# EAGLE board sdo_to_quiic (EAGLE 9.5.2)
REV: A
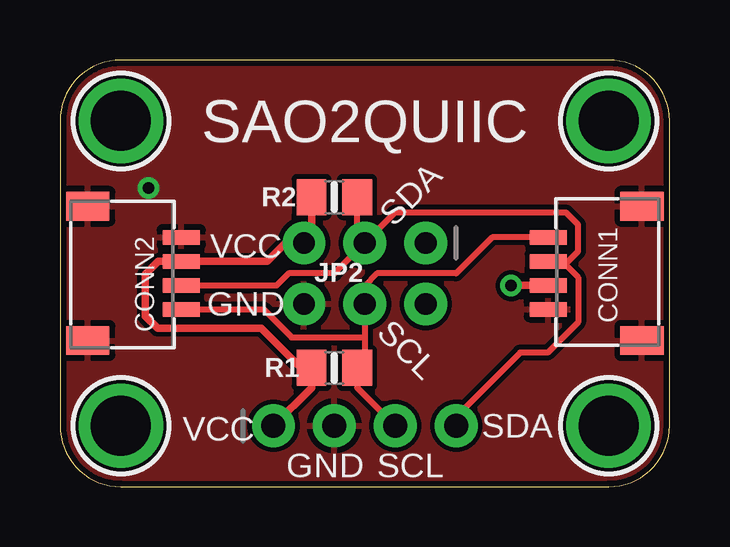
[diagram p0: board, top side]
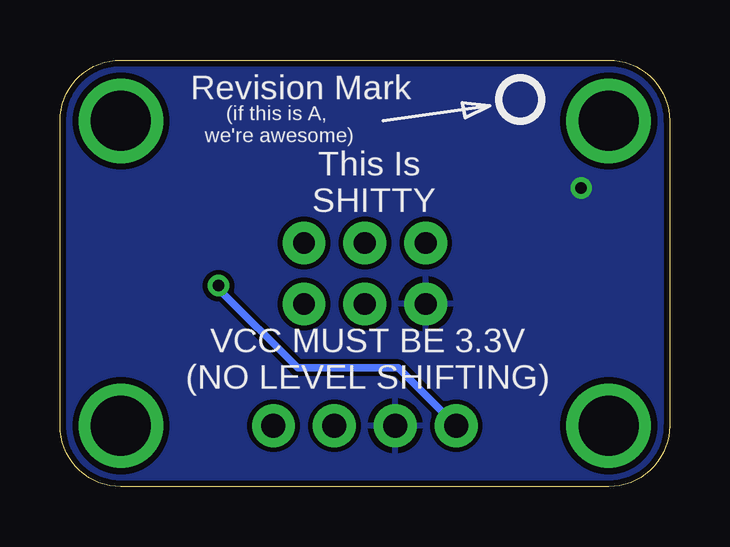
[diagram p1: board, bottom side, seen from below]

Size 25.4 x 17.78 mm. Coordinates in mm from the lower left corner, seen from the top.
Outline: 0,15.24 0,2.54 arc90 2.54,0 22.86,0 arc90 25.4,2.54 25.4,15.24 arc90 22.86,17.78 2.54,17.78 arc90 0,15.24
Copper layers (1*16): Top 0.035mm / dielectric 1.5mm / Bottom 0.035mm
Design rules "adafruit *": minimum track width 8mil, minimum drill 15.5mil, track to track 8mil, track to pad 8mil, pad to pad 8mil, via to via 8mil, smd to smd 8mil, copper to edge 10mil, drill to drill 8mil, minimum pad ring 10mil, minimum via ring 8mil, stop-mask expansion 2mil, vias tented up to drill 20mil, thermal gap 10mil
Net classes: 1 highpower: width 0.305 mm, drill 0.483 mm; 2 lowpower: width 0.254 mm, drill 0.483 mm

## Footprints (pad centres in the part's own frame; a part is rotated, then mirrored left to right if it is on the bottom)
JST_SH4 = smd 0.6 x 1.55: 1 -1.5,2.514; 2 -0.5,2.514; 3 0.5,2.514; 4 1.5,2.514 | smd 1.2 x 1.8: MT1 -2.8,-1.386; MT2 2.8,-1.386
2X03_ROUND_70MIL = drill 0.9 pad 1.778: 1 -2.54,-1.27; 2 -2.54,1.27; 3 0,-1.27; 4 0,1.27; 5 2.54,-1.27; 6 2.54,1.27
1X04_ROUND = drill 1 pad 1.778: 1 -3.81,0; 2 -1.27,0; 3 1.27,0; 4 3.81,0
0805-NO = smd 1.24 x 1.5: 1 -0.95,0; 2 0.95,0
MOUNTINGHOLE_2.5_PLATED = drill 2.5 pad 3.2: P$1 0,0

## Placement (x,y rotation side)
CONN1  STEMMA_I2C_QT  [JST_SH4]  22.86,8.89 90 top
CONN2  STEMMA_I2C_QT  [JST_SH4]  2.54,8.89 270 top
JP2  [2X03_ROUND_70MIL]  12.7,8.89 180 top
JP3  [1X04_ROUND]  12.7,2.54 0 top
R1  10K  [0805-NO]  11.43,4.95 0 top
R2  10K  [0805-NO]  11.43,12.06 0 top
U$1  MOUNTINGHOLE2.5  [MOUNTINGHOLE_2.5_PLATED]  2.54,15.24 0 top
U$17  MOUNTINGHOLE2.5  [MOUNTINGHOLE_2.5_PLATED]  22.86,15.24 0 top
U$19  MOUNTINGHOLE2.5  [MOUNTINGHOLE_2.5_PLATED]  2.54,2.54 0 top
U$21  MOUNTINGHOLE2.5  [MOUNTINGHOLE_2.5_PLATED]  22.86,2.54 0 top
U$25  [PCBFEAT-REV-040]  6.22,16.13 0 bottom

## Library data of the parts
CONN1 CONN2 JP2 JP3 R1 R2 U$25 = microbuilder
U$1 U$17 U$19 U$21 = microbuilder; BOM: EXCLUDE

## Nets
GND [highpower]: CONN1.1 CONN1.MT1 CONN1.MT2 CONN2.1 CONN2.MT1 CONN2.MT2 JP2.6 JP3.2
SAO_GPIO1: JP2.1
SAO_GPIO2: JP2.2
SCL: CONN1.4 CONN2.4 JP2.4 JP3.3 R1.2
SDA: CONN1.3 CONN2.3 JP2.3 JP3.4 R2.2
VCC [highpower]: CONN1.2 CONN2.2 JP2.5 JP3.1 R1.1 R2.1

## Tracks (layer width: path | path; a pad name or v marks a point on that pad's centre or on a via)
GND  (via drill 0.48)
  other vias: 3.68,12.45
  pour Top: 0,17.78 25.4,17.78 25.4,0 0,0
  pour Bottom: 0,17.78 25.4,17.78 25.4,0 0,0
SCL
  Top 0.254: 12.7,6.22 JP2.4 12.7,8.38 13.21,8.89 16.51,8.89 18.01,10.39 CONN1.4 | 12.7,6.22 12.7,5.27 R1.2 12.38,4.13 JP3.3 | CONN2.4 8.48,7.39 9.65,6.22 12.7,6.22
SDA
  Top 0.254: JP3.4 16.51,2.92 19.18,5.59 20.32,5.59 21.59,6.86 21.59,8.72 20.92,9.39 CONN1.3 21.17,9.39 21.59,9.81 21.59,10.92 21.08,11.43 13.97,11.43 JP2.3 | JP2.3 11.43,8.89 9.53,8.89 9.02,8.38 5.06,8.38 CONN2.3 | JP2.3 12.38,10.48 R2.2
VCC  (via drill 0.48)
  Top 0.305: JP3.1 10.48,4.13 R1.1 10.03,4.95 8.38,6.6 4.06,6.6 3.56,7.11 3.56,8.85 4.09,9.39 CONN2.2 8.63,9.39 9.4,10.16 JP2.5 10.48,10.48 R2.1 | v18.8,8.38 v18.8,8.39 CONN1.2
  Bottom 0.305: JP3.1 11.3,4.95 15.49,4.95 18.8,8.26 v18.8,8.38

## Text on the board
tPlace: SAO2QUIIC | SDA | VCC | GND | SCL | SDA | VCC | GND | SCL
bPlace: Revision Mark | (if this is A, / we're awesome) | This Is / SHITTY | VCC MUST BE 3.3V / (NO LEVEL SHIFTING)